# Altium PCB Charger.PcbDoc
Units mm, origin at the board's own origin, x right, y up, seen from the top; angles counter-clockwise.
Board outline 99.57 x 90.56 mm, 2 copper layers (Top Layer, Bottom Layer); 19 components, 13 nets, 58 pads, 0 vias.
Unrouted connection lines stored in the file: 7.
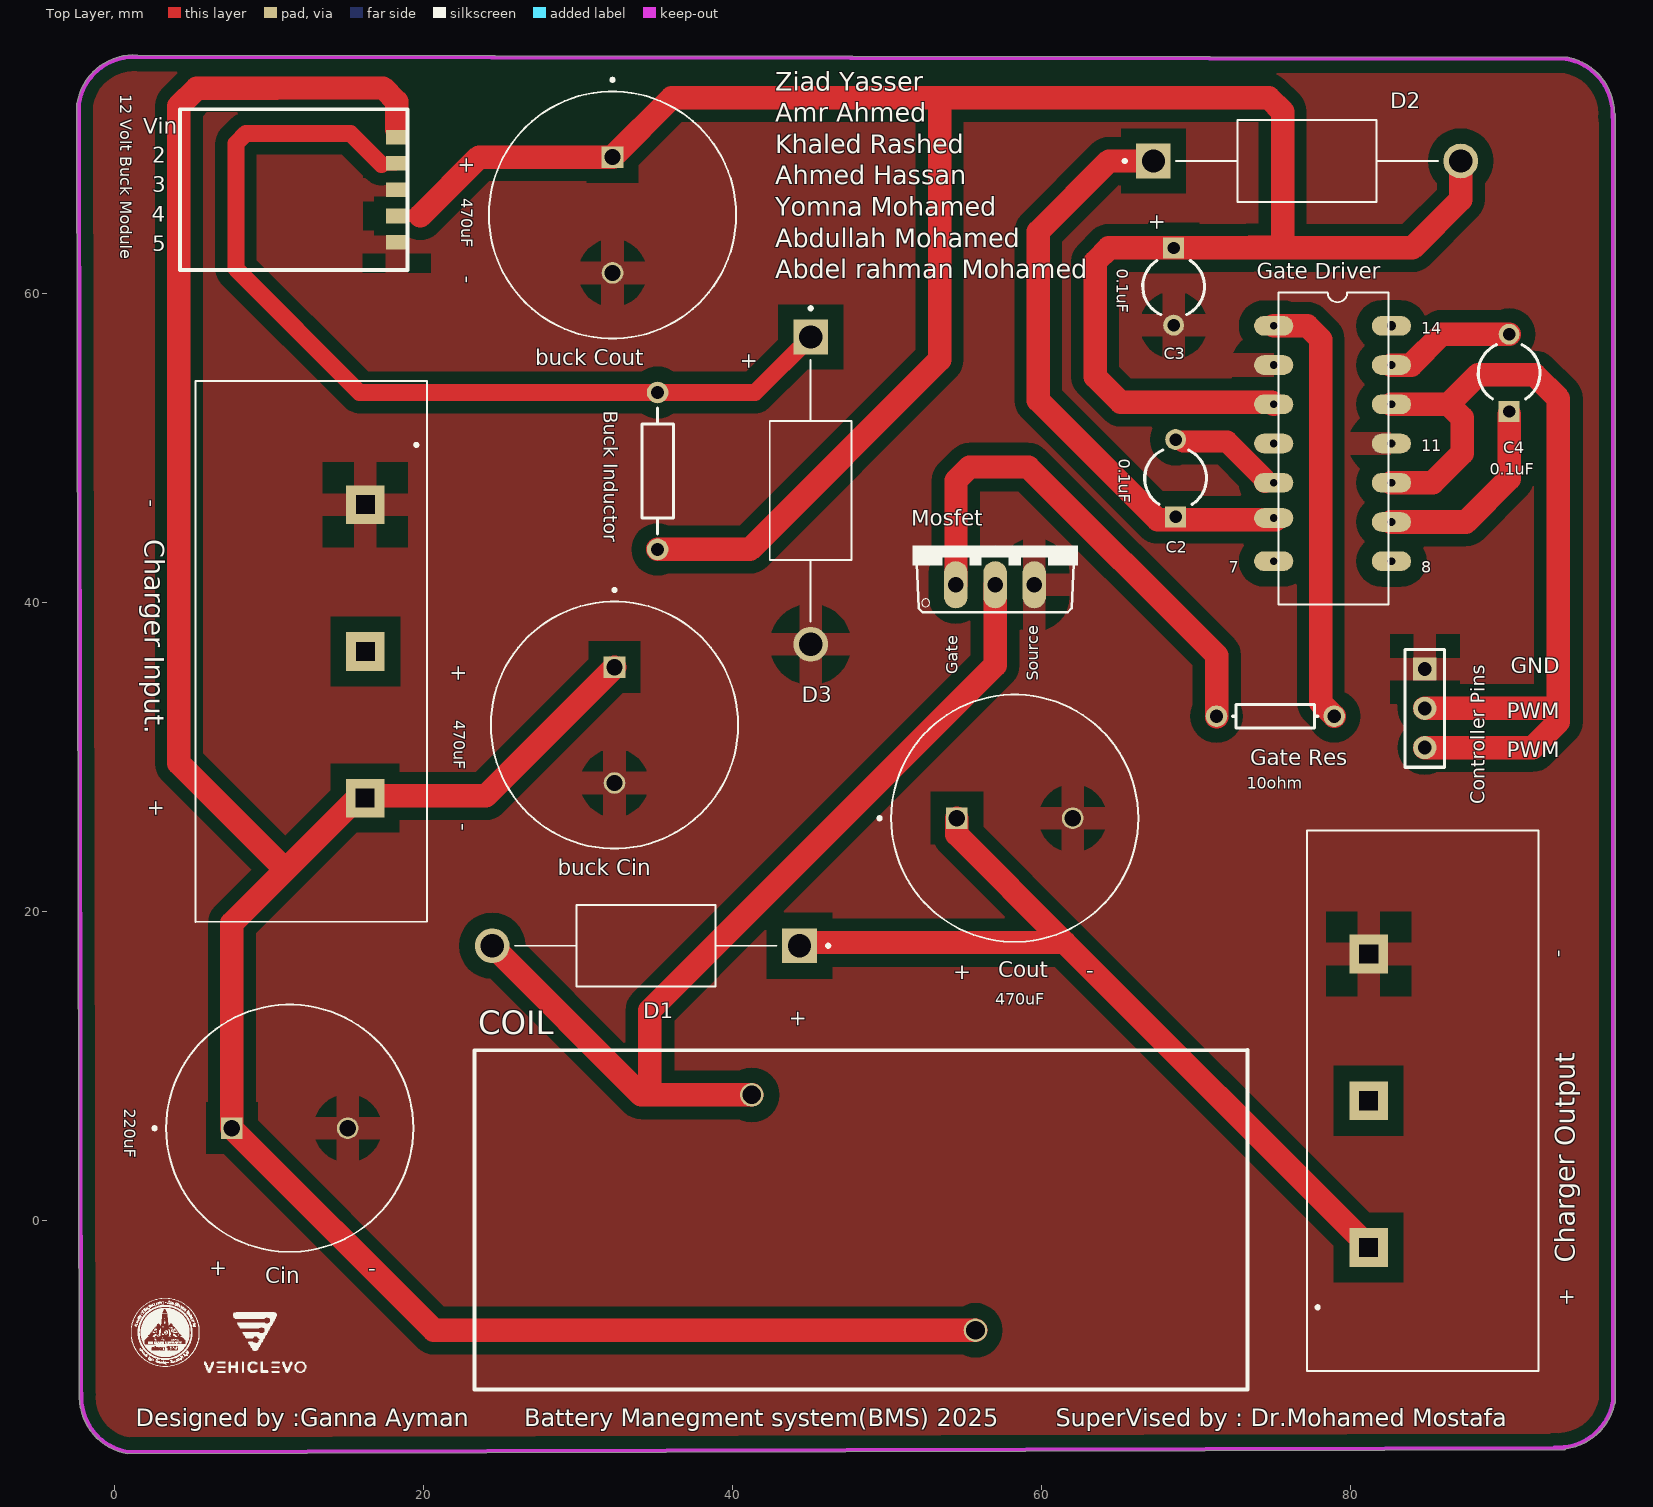
[diagram p0: Top Layer view]
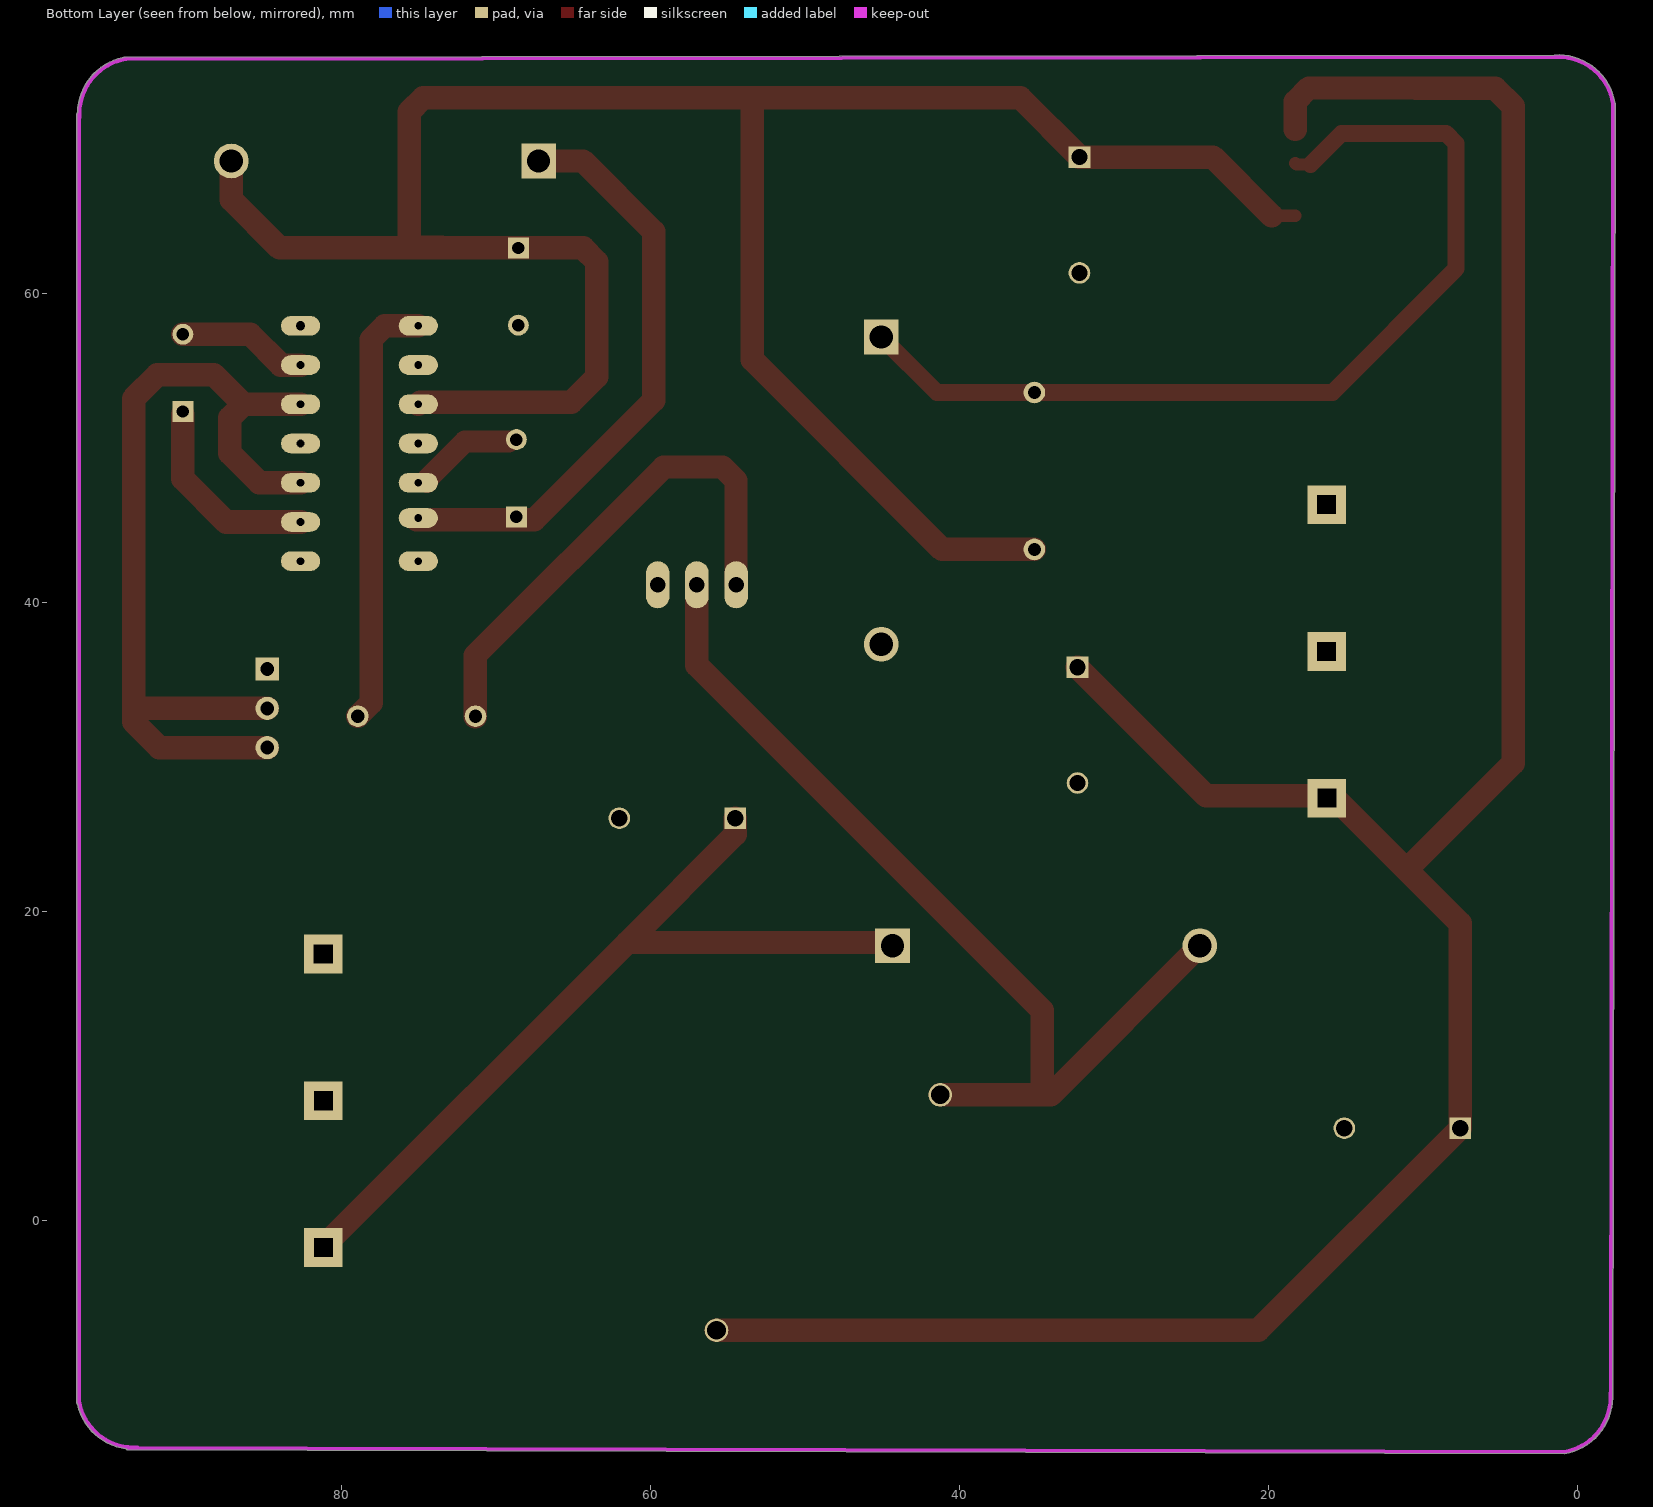
[diagram p1: Bottom Layer view, seen from below]
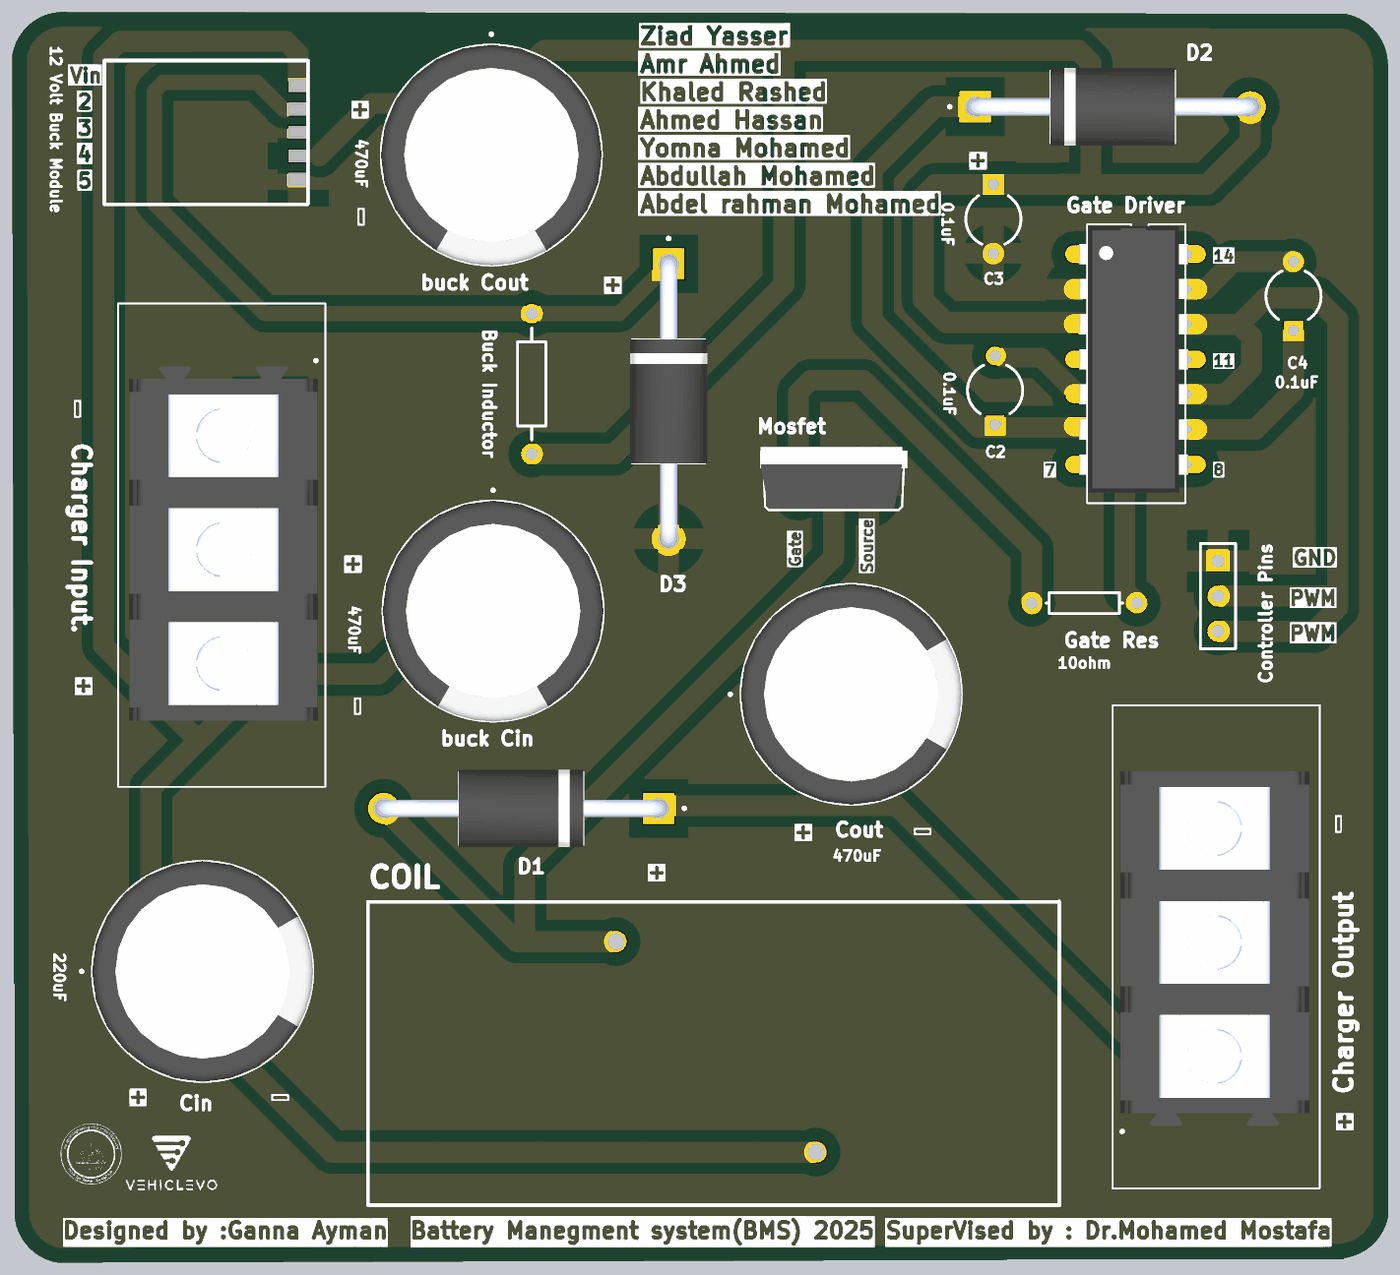
[diagram p2: 3D render of the assembled board from above, using the file's embedded part models]

## Layer stack, top to bottom
Top Solder: solder mask 0.0102, Solder Resist, Dk 3.5
Top Layer: signal copper 0.0356
Dielectric 1: dielectric 0.32, FR-4, Dk 4.8
Bottom Layer: signal copper 0.0356
Bottom Solder: solder mask 0.0102, Solder Resist, Dk 3.5

## Board outline
-2.249,-11.485 ccw(c1.49,-11.424) 0.868,-15.112 0.891,-15.113 93.853,-14.859 ccw(c93.853,-14.732) 93.968,-14.786 ccw(c93.467,-11.08) 97.114,-11.905 97.155,-11.811 97.155,-11.68 97.155,71.628 97.117,71.719 ccw(c93.379,71.622) 94.201,75.27 94.107,75.311 1.536,75.438 1.533,75.438 ccw(c1.279,71.707) -2.409,72.33 -2.413,72.263

## Design rules (kind name [scope] priority, off if disabled: settings)
Clearance [All] p1: gap=0.254 ignorepadtopadclearanceinfootprint=FALSE except(0: Arc-Text Arc-Hole Track-Text Track-Hole SMDPad-Hole THPad-Hole Via-Hole Fill-Hole Poly-Hole Region-Hole Text-Hole; 0.5: Arc-SMDPad Track-SMDPad; 0.8: Arc-Fill Arc-Poly Arc-Region Track-Fill Track-Poly Track-Region SMDPad-Fill SMDPad-Poly SMDPad-Region; 1: Arc-Arc Arc-Track Track-Track THPad-Fill THPad-Poly THPad-Region Fill-Fill Fill-Poly Fill-Region Poly-Poly Poly-Region Region-Region; 1.5: Via-Fill Via-Poly Via-Region)
PolygonConnect [All] p1: connectstyle=Relief reliefconductorwidth=1.5 reliefentries=4 polygonreliefangle="90 Angle" airgapwidth=1.5
RoomDefinition Charger [InComponentClass('Charger ')] p1: confinementstyle=ConfineIn formatcopy=TRUE lockcomponents=FALSE outline -6.477,-16.891 101.473,-16.891 101.473,77.724 -6.477,77.724
RoutingVias [All] p1: holewidth=0.711 width=1.27 viastyle="Through Hole" minholewidth=0.711 minwidth=1.27 maxholewidth=0.711 maxwidth=1.27
SolderMaskExpansion [All] p1: expansion=0.102 istentingtop=FALSE
Width [All] p1: maxlimit=2.54 minlimit=0.254 preferedwidth=0.254 bottomlayer_maxwidth=0.254 minimp=50.000000 maximp=50.000000 favimp=50.000000
30 further rules are at their usual default settings.

## Components (designator, comment, footprint, x,y, rotation, side; value= is the part's Value field where it differs from the comment)
"12 Volt Buck Module" "Component_1" PCBComponent_1#1 18.988,61.517 r90 top
"buck Cin" "470uF" CAPPRD750W80D1600H2500 32.385,32.064 r270 top (schematic designator "buck CIN")
"buck Cout" "470uF" CAPPRD750W80D1600H2500 32.258,65.084 r270 top
"Buck Inductor" "" AXIAL-0.4 35.179,48.514 r270 top value=33UH
C2 "0.1uF" CAPR5-4X5 68.707,48.046 r90 top value=0.1UF
C3 "0.1uF" CAPR5-4X5 68.58,60.452 r270 top
C4 "0.1uF" CAPR5-4X5 90.297,54.864 r90 top value=0.1UF
"Charger Input." "42.5v" TE_1977477-3 5.256,36.83 r270 top
"Charger Output" "42.5-60v" TE_1977477-3 92.202,7.747 r90 top
Cin "220uF" CAPPRD750W80D1600H2500 11.363,5.969 r0 top
COIL "200uH" PCBComponent_1#2 40.894,-16.764 r90 top
"Controller Pins" "Header 3" HDR1X3 84.836,35.687 r270 top
Cout "470uF" CAPPRD750W80D1600H2500 58.293,26.035 r0 top
D1 "SR360" DIOAD1990W125L900D530 34.417,17.78 r180 top
D2 "SR320" DIOAD1990W125L900D530 77.216,68.58 r0 top
D3 "SR360" DIOAD1990W125L900D530 45.085,47.244 r270 top
"Gate Driver" "Component_1" PCBComponent_1#3 78.867,50.292 r270 top
Mosfet "IRF740" TO220BV 57.023,43.688 r0 top
? "10ohm" AXIAL-0.3 75.164,32.639 r180 top value=10

## Footprints (in the part's own frame and the unit in brackets; to place one, negate y for a bottom-side part, rotate by r counter-clockwise, add the part's x,y. Pads: shape width x height; smd on the part's side, far side on the other; paste and mask are expansions set on the pad)
AXIAL-0.3 [mm] "Axial Device, Thru-Hole; 2 Leads; 0.3 in Pin Spacing"
  round 1.4 hole 0.85: 1(-3.81,0) 2(3.81,0)
  silkscreen extent -2.77,-0.76 2.77,0.76
AXIAL-0.4 [mm] "Axial Device, Thru-Hole; 2 Leads; 0.4 in Pin Spacing"
  round 1.4 hole 0.85: 1(-5.08,0) 2(5.08,0)
  silkscreen extent -4.06,-1.02 4.06,1.02
CAPPRD750W80D1600H2500 [mm]
  round 1.4 hole 1.05: N(3.75,0)
  rect 1.4x1.4 / inner round 1.4 / far side rect 1.4x1.4 hole 1.05: P(-3.75,0)
  silkscreen extent -8.85,-8 8,8, body extent -8,-8 8,8, height 25
CAPR5-4X5 [mm] "Capacitor; 2 Leads"
  rect 1.35x1.35 hole 0.8: 1(-2.5,0)
  round 1.35 hole 0.8: 2(2.5,0)
  silkscreen extent -1.69,-2 1.82,2
DIOAD1990W125L900D530 [mm]
  round 2.25 hole 1.5: A(9.95,0)
  rect 2.25x2.25 / inner round 2.25 / far side rect 2.25x2.25 hole 1.5: C(-9.95,0)
  silkscreen extent -11.9,-2.65 8.47,2.65, body extent -10.58,-2.8 10.58,2.8, height 5.6
HDR1X3 [mm] "Connector; Header; 3 Position"
  rect 1.5x1.5 hole 0.9: 1(0,0)
  round 1.5 hole 0.9: 2(2.54,0) 3(5.08,0)
  silkscreen extent -1.27,-1.27 6.35,1.27
PCBComponent_1#1 [mm]
  rect 0.95x1.4 smd: 1(8.607,0.7) 2(6.907,0.7) 3(5.207,0.7) 4(3.507,0.7) 5(1.807,0.7)
  silkscreen extent 0,0 10.41,14.73
PCBComponent_1#2 [mm]
  round 1.524 hole 1.2: 1(9.652,-14.859) 2(24.892,-0.381)
  silkscreen extent 5.81,-32.46 27.81,17.58
PCBComponent_1#3 [mm]
  oval 1.27x2.54 hole 0.5: 1(-7.62,-3.81) 2(-5.08,-3.81) 3(-2.54,-3.81) 4(0,-3.81) 5(2.54,-3.81) 6(4.826,-3.81) 7(7.62,-3.81) 8(7.62,3.81) 9(5.08,3.81) 10(2.54,3.81) 11(0,3.81) 12(-2.54,3.81) 13(-5.08,3.81) 14(-7.62,3.81)
  round 0.6 hole 0.6 unplated: ""(-7.62,3.81)
  silkscreen extent -9.78,-3.49 10.41,3.61, body extent -9.65,-4.1 9.65,3.81, height 5.33
TE_1977477-3 [mm]
  rect 2.5x2.5 hole 1.2 square: 1(-9.5,11) 2(0,11) 3(9.5,10.992)
  silkscreen extent -17.5,0 17.5,15, body extent -12.95,0.76 12.7,14.46, height 14.8
TO220BV [mil]
  oval 60x120 hole 40: D(0,-100) G(-100,-100) S(100,-100)
  silkscreen extent -210,-170 210,0, body extent -208,-165 195,10, height 783

## Part data
"buck Cin" "buck Cout" Cin Cout: library part ECA2AM471B, "CAP ALUM 470UF 20% 100V RADIAL", Package="RADIAL-2 Panasonic", Availability="In Stock", Check_prices=https://www.snapeda.com/parts/ECA2AM471B/Panasonic/view-part/?ref=eda, MF=Panasonic, MP=ECA2AM471B, Price=None, Purchase-URL=https://pricing.snapeda.com/search/part/ECA2AM471B/?ref=eda, SnapEDA_Link=https://www.snapeda.com/parts/ECA2AM471B/Panasonic/view-part/?ref=snap
"Buck Inductor": library part Res2, "Resistor", LatestRevisionDate=17-Jul-2002, LatestRevisionNote="Re-released for DXP Platform.", PackageDescription="Axial Device, Thru-Hole; 2 Leads; 0.4 in Pin Spacing", PackageReference=AXIAL-0.4, Published=8-Jun-2000, Publisher="Altium Limited"
C2 C3 C4: library part Cap2, "Capacitor", PackageDescription="Capacitor; 2 Leads", PackageReference=CAPR5-4X5, Published=23-Sep-2002, Publisher="Altium Limited"
"Charger Input." "Charger Output": library part 1977477-3, "Conn Barrier Strip 3 POS 8.25mm Solder ST Thru-Hole 15A/Contact Box", Package=None, Check_prices=https://www.snapeda.com/parts/1977477-3/TE+Connectivity+AMP+Connectors/view-part/?ref=eda, MF="TE Connectivity", MP=1977477-3, SnapEDA_Link=https://www.snapeda.com/parts/1977477-3/TE+Connectivity+AMP+Connectors/view-part/?ref=snap
COIL: library part Component_1
"Controller Pins": "Header, 3-Pin", LatestRevisionDate=17-Jul-2002, LatestRevisionNote="Re-released for DXP Platform.", Publisher="Altium Limited"
D1 D3: library part SR320, "3A, 200V, Schottky Rectifier", Package="DO-201AD Taiwan Semiconductor", Check_prices=https://www.snapeda.com/parts/SR320/Taiwan+Semiconductor/view-part/?ref=eda, MF="Taiwan Semiconductor", MP=SR320, SnapEDA_Link=https://www.snapeda.com/parts/SR320/Taiwan+Semiconductor/view-part/?ref=snap
D2: "3A, 200V, Schottky Rectifier", Package="DO-201AD Taiwan Semiconductor", Check_prices=https://www.snapeda.com/parts/SR320/Taiwan+Semiconductor/view-part/?ref=eda, MF="Taiwan Semiconductor", MP=SR320, SnapEDA_Link=https://www.snapeda.com/parts/SR320/Taiwan+Semiconductor/view-part/?ref=snap
Mosfet: "N-Channel 400 V 10A (Tc) 3.1W (Ta), 125W (Tc) Surface Mount DÂ²PAK (TO-263)", Package="TO-220-3 Vishay", Availability="In Stock", Check_prices=https://www.snapeda.com/parts/IRF740/Vishay+Siliconix/view-part/?ref=eda, MF=Vishay, MP=IRF740, Price=None, Purchase-URL=https://pricing.snapeda.com/search/part/IRF740/?ref=eda, SnapEDA_Link=https://www.snapeda.com/parts/IRF740/Vishay+Siliconix/view-part/?ref=snap
?: library part Res1, "Resistor", LatestRevisionDate=17-Jul-2002, LatestRevisionNote="Re-released for DXP Platform.", PackageDescription="Axial Device, Thru-Hole; 2 Leads; 0.3 in Pin Spacing", PackageReference=AXIAL-0.3, Published=8-Jun-2000, Publisher="Altium Limited"

## Nets (pads, with @x,y where several pads share a name; then routed paths per layer and width w, separated by ;. In a path a pad name is that pad's centre, name@x,y a point inside that pad or via, vN(x,y) a via of type N, cw(c..) or ccw(c..) an arc to the next point about the centre after c; other vN are vias at no path point)
GND: "12 Volt Buck Module.3" "12 Volt Buck Module.5" "buck Cin.N" "buck Cout.N" "Charger Input..1" "Charger Output.3" "Controller Pins.1" "Gate Driver.2" "Gate Driver.11" C3.2 Cin.N Cout.N D3.A Mosfet.S
LO: "Gate Driver.1" ?.1 | length 28.2
  Top Layer w1.5: 75.057,57.912 77.226,57.912 78.105,57.033 78.105,33.508 ?.1
"Net12 Volt Buck Module_1": "12 Volt Buck Module.1" "buck Cin.P" "Charger Input..3" Cin.P COIL.1 | length 167.5
  Top Layer w1.5: 10.502,73.295 10.514,73.307 17.409,73.307 18.288,72.428 18.288,70.612
  Top Layer w1.524: 10.502,73.295 5.354,73.295 4.191,72.132 4.191,29.591 11.083,22.699 ; 32.385,35.814 24.053,27.482 15.867,27.482 11.083,22.699 ; COIL.1 20.694,-7.112 Cin.P 7.613,19.228 11.083,22.699
"Net12 Volt Buck Module_2": "12 Volt Buck Module.2" "Buck Inductor.1" D3.C | length 61.6
  Top Layer w0.8: 17.295,68.349 18.213,68.349 18.288,68.424
  Top Layer w1.1: 17.295,68.349 15.286,70.358 8.518,70.358 7.874,69.714 7.874,61.605 15.885,53.594 35.098,53.594 ; 35.179,53.594 41.485,53.594 D3.C
"Net12 Volt Buck Module_4": "12 Volt Buck Module.4" "buck Cout.P" "Buck Inductor.2" "Gate Driver.3" C3.1 D2.A | length 157.3
  Top Layer w0.8: 18.288,65.024 19.812,65.024
  Top Layer w1.524: 19.812,65.024 23.622,68.834 32.258,68.834 36.092,72.668 74.739,72.668 75.632,71.775 75.632,63.246 ; 35.179,43.434 41.148,43.434 53.429,55.715 53.429,72.668 ; 73.533,62.952 64.393,62.952 63.5,62.059 63.5,54.61 65.151,52.959 74.93,52.959 75.057,52.832 ; 73.533,62.979 74.739,62.979 ; 74.739,62.952 76.287,62.952 84.034,62.952 87.166,66.084 D2.A
Net_2: ?.2 Mosfet.G | length 33
  Top Layer w1.5: Mosfet.G 54.483,47.889 55.362,48.768 59.182,48.768 71.374,36.576 ?.2@71.374,32.586
NetC2_1: "Gate Driver.6" C2.1 D2.C | length 38.8
  Top Layer w1.5: D2.C 64.389,68.58 59.817,64.008 59.817,53.086 67.552,45.351 68.707,45.351 75.184,45.351
NetC2_2: "Gate Driver.5" C2.2 | length 6.5
  Top Layer w1.4: C2.2@69.215,50.419 72.048,50.419 74.487,47.98 74.487,47.801
NetC4_1: "Gate Driver.9" C4.1 | length 13
  Top Layer w1.524: 82.677,45.212 87.503,45.212 90.297,48.006 C4.1@90.297,52.2
NetC4_2: "Gate Driver.13" C4.2 | length 8.4
  Top Layer w1.524: 82.677,55.372 83.947,55.372 85.939,57.364 C4.2
"NetCharger Output _1": "Charger Output.1" Cout.P D1.C | length 56.1
  Top Layer w1.5: D1.C 44.57,17.983 61.544,17.983 ; Cout.P 54.543,24.984 61.544,17.983 ; 81.28,-1.753 61.544,17.983
NetCOIL_2: COIL.2 D1.A Mosfet.D | length 62.6
  Top Layer w1.524: D1.A 34.119,8.128 COIL.2 ; 34.671,8.617 34.671,13.589 57.023,35.941 Mosfet.D
PWM: "Controller Pins.2" "Controller Pins.3" "Gate Driver.10" "Gate Driver.12" | length 60.1
  Top Layer w1.524: 82.677,47.752 85.344,47.752 87.265,49.673 87.265,51.947 86.38,52.832 ; 82.677,52.832 86.38,52.832 ; 84.836,30.607 91.821,30.607 93.488,32.274 93.488,33.147 ; 84.836,33.147 93.488,33.147 ; 86.38,52.832 88.285,54.737 91.948,54.737 93.488,53.197 93.488,33.147
pads on no net: "Charger Input..2" "Charger Output.2" "Gate Driver.4" "Gate Driver.7" "Gate Driver.8" "Gate Driver.14" "Gate Driver."

## Polygon pours and split planes (outlines as drawn)
GND on Top Layer "GND" (solid, remove dead copper, pour order 0): -2.249,-11.485 ccw(c1.49,-11.424) 0.868,-15.112 0.891,-15.113 93.853,-14.859 ccw(c93.853,-14.732) 93.968,-14.786 ccw(c93.467,-11.08) 97.114,-11.905 97.155,-11.811 97.155,-11.68 97.155,71.628 97.117,71.719 ccw(c93.379,71.622) 94.201,75.27 94.107,75.311 1.536,75.438 1.533,75.438 ccw(c1.279,71.707) -2.409,72.33 -2.413,72.263

## Keep-outs
Keep-Out Layer:
  lines w0.254: -2.286,72.263 -2.134,-11.43 ; -2.283,72.309 cw(c1.279,71.707) 1.524,75.311 ; -2.113,-11.179 ccw(c1.49,-11.424) 0.889,-14.986 93.853,-14.732 ; 1.143,75.311 94.107,75.184 ; 93.222,-14.684 ccw(c93.467,-11.08) 97.028,-11.684 ; 93.98,75.184 cw(c93.379,71.622) 96.982,71.377 ; 97.028,-11.811 97.028,71.628

## Silkscreen, mask and mechanical layers (free items; w line width, h text height)
Top Overlay:
  drawing of 124 lines, arcs and shapes, not listed
  text "Ziad Yasser" at 42.799,73.143 h1.2
  text "Amr Ahmed" at 42.799,71.115 h1.2
  text "Vin" at 1.889,70.358 h1.02
  text "Khaled Rashed" at 42.799,69.087 h1.2
  text "+" at 22.352,68.888 h1.02 r270
  text "2" at 2.455,68.453 h1.02
  text "Ahmed Hassan" at 42.799,67.059 h1.2
  text "3" at 2.455,66.548 h1.02
  text "+" at 67.056,65.205 h1.02 r270
  text "Yomna Mohamed" at 42.799,65.03 h1.2
  text "4" at 2.431,64.643 h1.02
  text "Abdullah Mohamed" at 42.799,63.002 h1.2
  text "5" at 2.455,62.738 h1.02
  text "-" at 22.425,61.141 h1.02 r270
  text "Abdel rahman Mohamed" at 42.799,60.974 h1.2
  text "14" at 84.593,57.404 h0.76
  text "+" at 40.64,56.188 h1.02 r270
  text "11" at 84.593,49.784 h0.76
  text "-" at 2.721,46.174 h1.02 r90
  text "7" at 72.136,41.91 h0.76
  text "8" at 84.593,41.91 h0.76
  text "+" at 21.844,35.995 h1.02 r270
  text "GND" at 90.399,35.433 h1.02
  text "Gate" at 54.61,35.353 h0.76 r90
  text "Source" at 59.817,34.922 h0.76 r90
  text "PWM" at 90.142,32.512 h1.02
  text "PWM" at 90.142,29.972 h1.02
  text "Gate Res" at 73.533,29.464 h1.02
  text "+" at 3.157,26.108 h1.02 r90
  text "-" at 22.171,25.708 h1.02 r270
  text "-" at 93.164,17.526 h1.02 r270
  text "-" at 62.938,15.694 h1.02
  text "+" at 54.302,15.621 h1.02
  text "+" at 43.815,13.643 h1.02 r270
  text "+" at 6.169,-3.556 h1.02
  text "-" at 16.456,-3.574 h1.02
  text "+" at 93.599,-4.391 h1.02 r270
  text "Designed by :Ganna Ayman" at 1.396,-13.335 h1.14
  text "Battery Manegment system(BMS) 2025" at 26.527,-13.335 h1.14
  text "SuperVised by : Dr.Mohamed Mostafa" at 60.937,-13.335 h1.14